# Altium PCB PCB.PcbDoc
Units mm, origin at the board's own origin, x right, y up, seen from the top; angles counter-clockwise.
Board outline 85.09 x 62.86 mm, 4 copper layers (Top Layer, Internal Plane 1, Internal Plane 2, Bottom Layer); 30 components, 16 nets, 76 pads, 0 vias.
Unrouted connection lines stored in the file: 60.
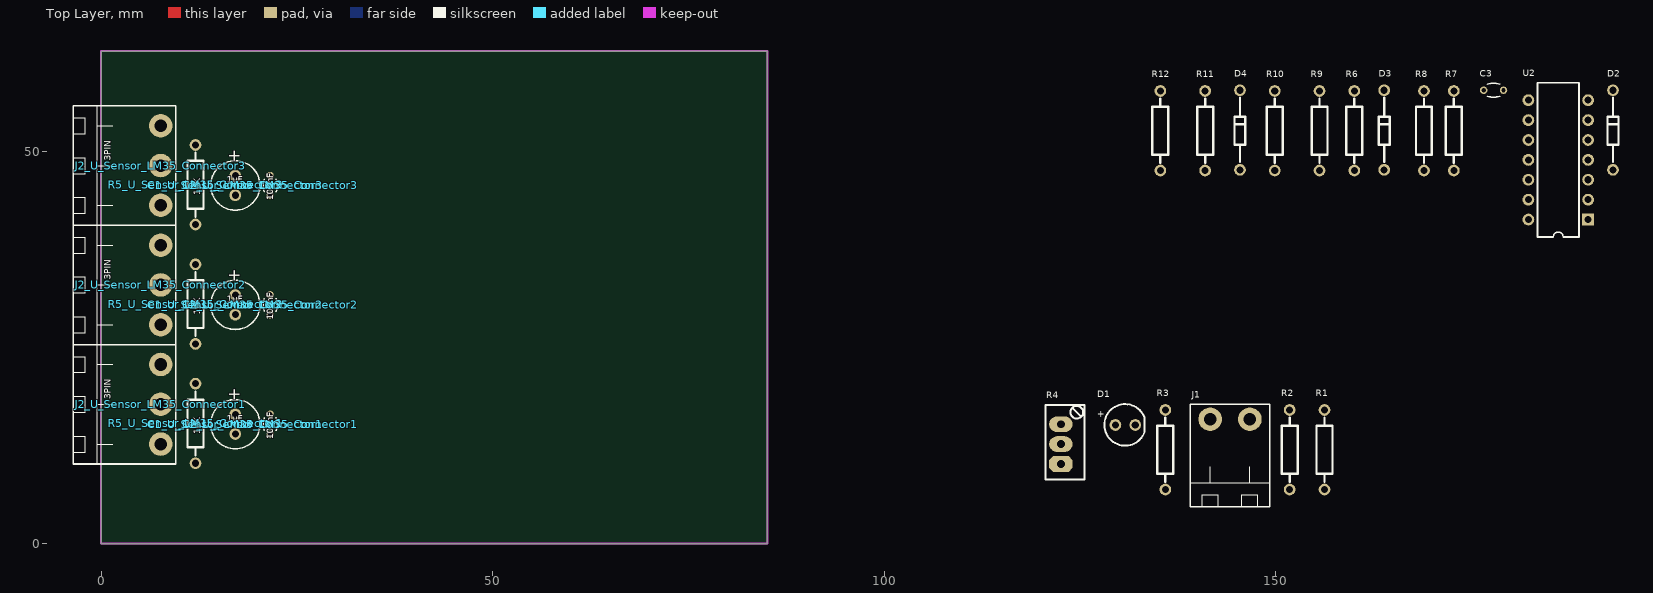
[diagram p0: Top Layer view]
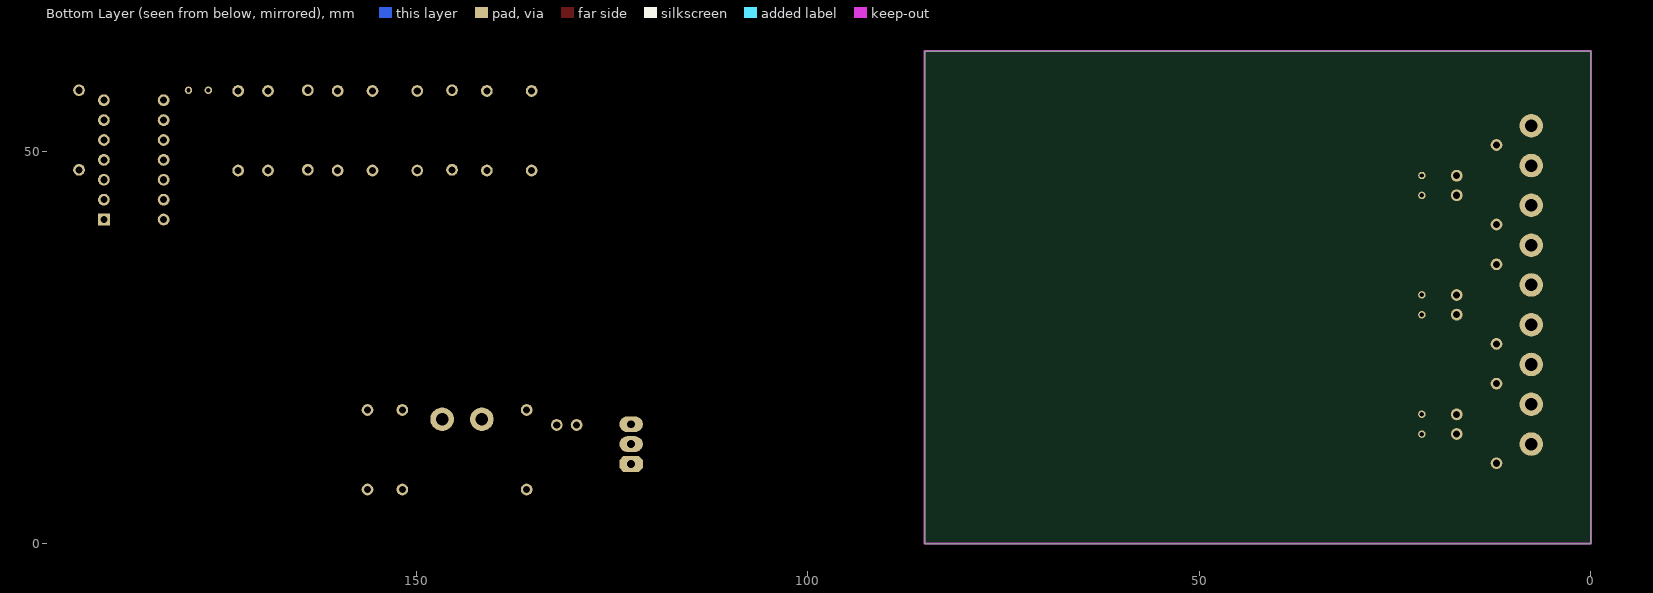
[diagram p1: Bottom Layer view, seen from below]
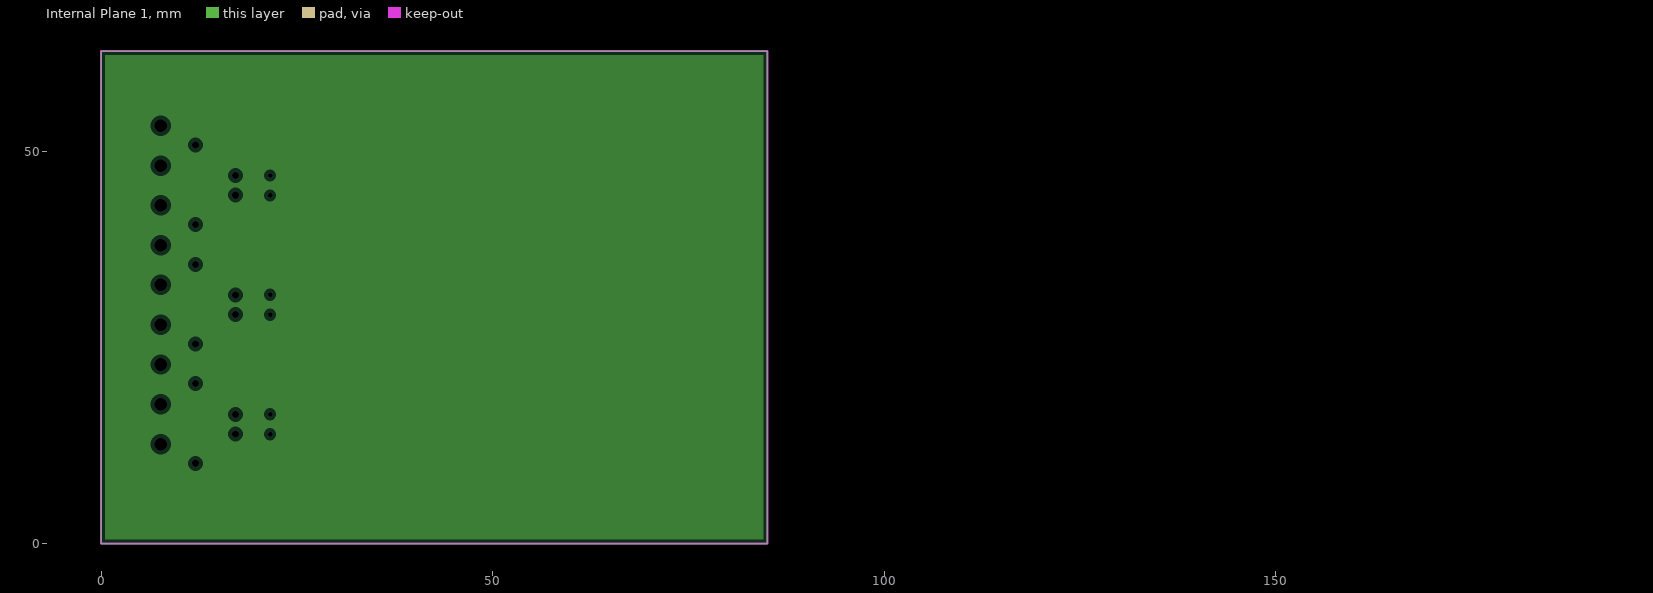
[diagram p2: Internal Plane 1, clearances drawn from the general rule]
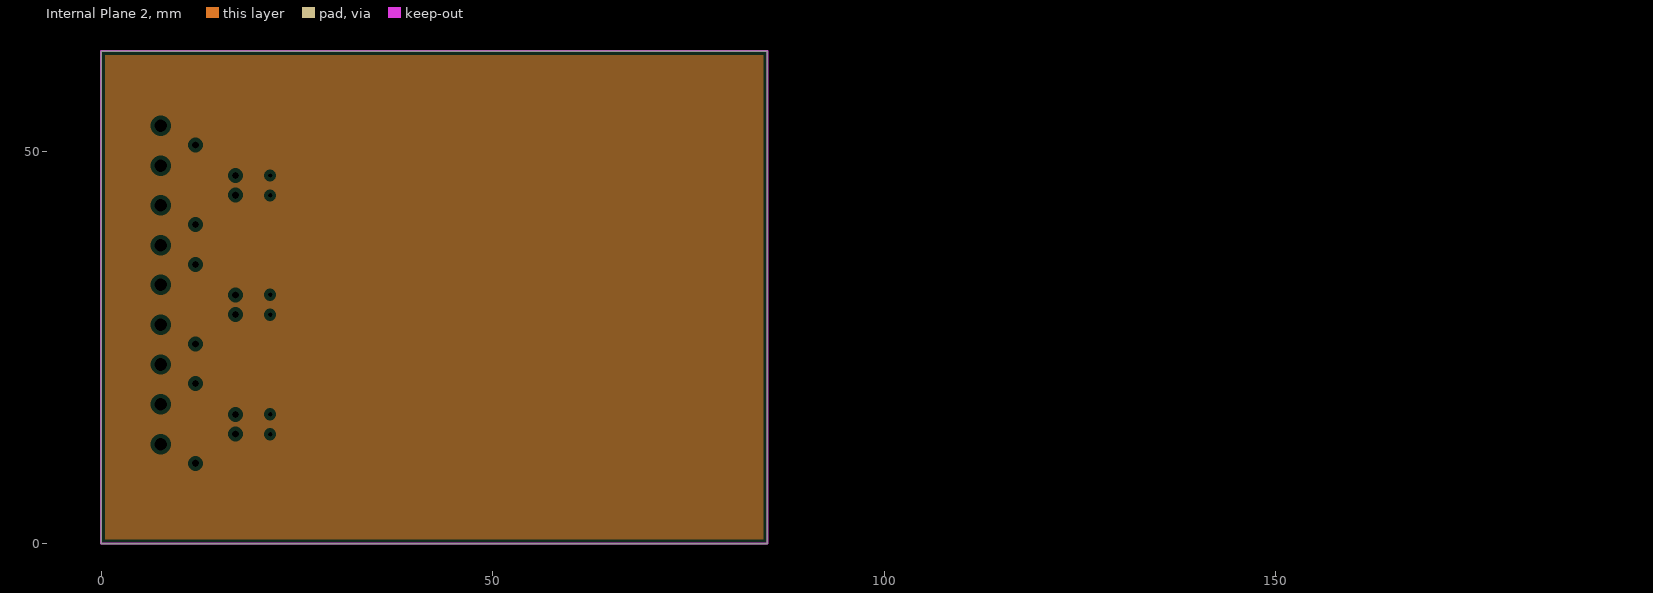
[diagram p3: Internal Plane 2, clearances drawn from the general rule]

## Layer stack, top to bottom
Top Solder: solder mask 0.0102, Solder Resist, Dk 3.5
Top Layer: signal copper 0.0356
Dielectric1: dielectric 0.32, FR-4, Dk 4.8
Internal Plane 1: plane copper 0.0356
Dielectric2: dielectric 0.32, FR-4, Dk 4.8
Internal Plane 2: plane copper 0.0356
Dielectric3: dielectric 0.32, FR-4, Dk 4.8
Bottom Layer: signal copper 0.0356
Bottom Solder: solder mask 0.0102, Solder Resist, Dk 3.5

## Board outline
0,0 85.09,0 85.09,62.865 0,62.865

## Design rules (kind name [scope] priority, off if disabled: settings)
Clearance [All] p1: gap=0.6
ComponentClearance [All] p1: gap=0 collisioncheckmode=3 verticalgap=0 showdistances=FALSE
Height [All] p1: minheight=0 maxheight=50 prefheight=12.7
HoleSize [All] p1: absolutevalues=TRUE maxlimit=5 minlimit=0.025 maxpercent=80.000 minpercent=20.000
PlaneClearance [All] p1: clearance=0.508
PlaneConnect [All] p1: planeconnectstyle=Relief reliefexpansion=0.508 reliefentries=4 reliefconductorwidth=0.254 reliefairgap=0.254
PolygonConnect [All] p1: connectstyle=Relief reliefconductorwidth=0.254 reliefentries=4 polygonreliefangle="90 Angle" airgapwidth=0.254
RoomDefinition U_Sensor_LM35_Package [InComponentClass('U_Sensor_LM35_Package')] p1: confinementstyle=ConfineIn formatcopy=TRUE lockcomponents=FALSE outline 133.35,38.825 195.58,38.825 195.58,61.685 133.35,61.685
RoomDefinition U_Sensor_LM35_Connector3 [InComponentClass('U_Sensor_LM35_Connector3')] p2: confinementstyle=ConfineIn formatcopy=TRUE lockcomponents=FALSE outline -3.81,39.37 22.86,39.37 22.86,56.515 -3.81,56.515
RoomDefinition U_Sensor_LM35_Connector2 [InComponentClass('U_Sensor_LM35_Connector2')] p3: confinementstyle=ConfineIn formatcopy=TRUE lockcomponents=FALSE outline -3.81,24.13 22.86,24.13 22.86,41.275 -3.81,41.275
RoomDefinition U_Sensor_LM35_Connector1 [InComponentClass('U_Sensor_LM35_Connector1')] p4: confinementstyle=ConfineIn formatcopy=TRUE lockcomponents=FALSE outline -3.81,8.89 22.86,8.89 22.86,26.035 -3.81,26.035
RoomDefinition Main [InComponentClass('Main')] p5: confinementstyle=ConfineIn formatcopy=TRUE lockcomponents=FALSE outline 120.015,4.445 158.115,4.445 158.115,20.955 120.015,20.955
RoutingVias [All] p1: holewidth=0.813 width=1.575 viastyle="Through Hole" minholewidth=0.711 minwidth=1.27 maxholewidth=0.711 maxwidth=1.27
SilkToSolderMaskClearance SilkscreenOverComponentPads [IsPad] p1: minsilkscreentomaskgap=0.254 clearancetoexposedcopper=TRUE
SolderMaskExpansion [All] p1: expansion=0.102
Width [All] p1: maxlimit=0.254 minlimit=0.254 preferedwidth=0.254
Width Width_VDD [InNet('VDD_2')] p2 off: maxlimit=0.3 minlimit=0.3 preferedwidth=0.3
24 further rules are at their usual default settings.

## Classes and differential pairs
channel class Sensor_LM35_Connector: U_Sensor_LM35_Connector1 U_Sensor_LM35_Connector2 U_Sensor_LM35_Connector3
component class U_Sensor_LM35_Package: C3 D2 D3 D4 R6 R7 R8 R9 R10 R11 R12 U2
component class U_Sensor_LM35_Connector3: C1_U_Sensor_LM35_Connector3 C2_U_Sensor_LM35_Connector3 J2_U_Sensor_LM35_Connector3 R5_U_Sensor_LM35_Connector3
component class U_Sensor_LM35_Connector2: C1_U_Sensor_LM35_Connector2 C2_U_Sensor_LM35_Connector2 J2_U_Sensor_LM35_Connector2 R5_U_Sensor_LM35_Connector2
component class U_Sensor_LM35_Connector1: C1_U_Sensor_LM35_Connector1 C2_U_Sensor_LM35_Connector1 J2_U_Sensor_LM35_Connector1 R5_U_Sensor_LM35_Connector1
component class Main: D1 J1 R1 R2 R3 R4

## Components (designator, comment, footprint, x,y, rotation, side; value= is the part's Value field where it differs from the comment)
C1_U_Sensor_LM35_Connector1 "1uF" CAPPR2.5-6.3x5 17.145,15.24 r270 top (schematic designator C1)
C1_U_Sensor_LM35_Connector2 "1uF" CAPPR2.5-6.3x5 17.145,30.48 r270 top (schematic designator C1)
C1_U_Sensor_LM35_Connector3 "1uF" CAPPR2.5-6.3x5 17.145,45.72 r270 top (schematic designator C1)
C2_U_Sensor_LM35_Connector1 "100nF" CAPNTO2.54-3.05x1.78A 21.59,15.24 r90 top (schematic designator C2)
C2_U_Sensor_LM35_Connector2 "100nF" CAPNTO2.54-3.05x1.78A 21.59,30.48 r90 top (schematic designator C2)
C2_U_Sensor_LM35_Connector3 "100nF" CAPNTO2.54-3.05x1.78A 21.59,45.72 r90 top (schematic designator C2)
C3 "100nF" CAPNTO2.54-3.05x1.78A 177.8,57.875 r0 top
D1 "RED" LED-5mm_Red 130.81,15.24 r0 top
D2 "1N4148" DIODE0.4_Glass 193.04,52.795 r90 top
D3 "1N4148" DIODE0.4_Glass 163.83,52.795 r90 top
D4 "1N4148" DIODE0.4_Glass 145.415,52.795 r90 top
J1 "2PIN" Fonics_2PIN_1 144.145,15.875 r0 top
J2_U_Sensor_LM35_Connector1 "3PIN" Fonics_3PIN_1 7.62,17.78 r270 top (schematic designator J2)
J2_U_Sensor_LM35_Connector2 "3PIN" Fonics_3PIN_1 7.62,33.02 r270 top (schematic designator J2)
J2_U_Sensor_LM35_Connector3 "3PIN" Fonics_3PIN_1 7.62,48.26 r270 top (schematic designator J2)
R1 "220K" AXIAL-0.4 156.21,10.795 r90 top
R2 "1K" AXIAL-0.4 151.765,10.795 r90 top
R3 "10K" AXIAL-0.4 135.89,10.795 r90 top
R4 "10K" VR4_ 122.555,12.7 r90 top
R5_U_Sensor_LM35_Connector1 "10K" AXIAL-0.4 12.065,16.51 r270 top (schematic designator R5)
R5_U_Sensor_LM35_Connector2 "10K" AXIAL-0.4 12.065,31.75 r270 top (schematic designator R5)
R5_U_Sensor_LM35_Connector3 "10K" AXIAL-0.4 12.065,46.99 r270 top (schematic designator R5)
R6 "1K" AXIAL-0.4 160.02,51.525 r90 top
R7 "1K" AXIAL-0.4 172.72,51.525 r90 top
R8 "1K" AXIAL-0.4 168.91,51.525 r90 top
R9 "1K" AXIAL-0.4 155.575,51.525 r90 top
R10 "1K" AXIAL-0.4 149.86,51.525 r90 top
R11 "1K" AXIAL-0.4 140.97,51.525 r90 top
R12 "1K" AXIAL-0.4 135.255,51.525 r90 top
U2 "LM324" 646-06 186.055,48.985 r90 top

## Footprints (in the part's own frame and the unit in brackets; to place one, negate y for a bottom-side part, rotate by r counter-clockwise, add the part's x,y. Pads: shape width x height; smd on the part's side, far side on the other; paste and mask are expansions set on the pad)
646-06 [mm] "DIP; 14 Leads; Row Spacing 7.62 mm; Pitch 2.54 mm"
  rect 1.5x1.5 hole 0.9: 1(-7.62,-3.81)
  round 1.5 hole 0.9: 2(-5.08,-3.81) 3(-2.54,-3.81) 4(0,-3.81) 5(2.54,-3.81) 6(5.08,-3.81) 7(7.62,-3.81) 8(7.62,3.81) 9(5.08,3.81) 10(2.54,3.81) 11(0,3.81) 12(-2.54,3.81) 13(-5.08,3.81) 14(-7.62,3.81)
  silkscreen extent -9.85,-2.65 9.85,2.65
AXIAL-0.4 [mm]
  round 1.5 hole 0.9: 1(-3.9,0) 2(6.26,0)
  silkscreen extent -2.88,-1.02 5.24,1.02, body extent -4.19,-1.19 6.58,1.12, height 3.51
CAPNTO2.54-3.05x1.78A [mm] "Capacitor, Radial, Tantalum, Non-Polarised; Body 3.05 x 1.78 x 3.43 mm (WxTxH max); Pin Spacing 2.54 mm (typ)"
  round 0.95 hole 0.55: 1(-1.27,0) 2(1.27,0)
  silkscreen extent -0.8,-0.89 0.8,0.89
CAPPR2.5-6.3x5 [mm] "Capacitor, Electrolytic, Radial; Body 6.3 x 5 mm (Dia.xH typ); Pin Spacing 2.5 mm (typ)"
  round 1.5 hole 0.9: 1(-1.25,0) 2(1.25,0)
  silkscreen extent -3.15,-3.15 3.15,3.15
DIODE0.4_Glass [mm] "created by: M.Hariri (designer)"
  round 1.5 hole 0.9: 1(-5.08,0) 2(5.08,0)
  silkscreen extent -4.08,-0.7 4.12,0.7
Fonics_2PIN_1 [mm]
  round 3 hole 1.6: 1(-2.54,0) 2(2.54,0)
  silkscreen extent -5.08,-11.18 5.08,1.91
Fonics_3PIN_1 [mm]
  round 3 hole 1.6: 1(-5.08,0) 2(0,0) 3(5.08,0)
  silkscreen extent -7.62,-11.18 7.62,1.91
LED-5mm_Red [mm]
  round 1.5 hole 0.9: 1(-1.3,-0.1) 2(1.24,-0.1)
  silkscreen extent -2.71,-2.74 2.43,2.56, body extent -2.6,-2.64 2.48,2.46, height 9.6
VR4_ [mm]
  oct 2x3 hole 1: 1(-2.54,0)
  oval 2x3 hole 1: 2(2.54,0) 3(0,0)
  silkscreen extent -4.54,-3.01 4.96,1.99

## Part data
C1_U_Sensor_LM35_Connector1 C1_U_Sensor_LM35_Connector2 C1_U_Sensor_LM35_Connector3: library part "Cap Pol1", "Polarized Capacitor (Radial)"
C2_U_Sensor_LM35_Connector1 C2_U_Sensor_LM35_Connector2 C2_U_Sensor_LM35_Connector3 C3: library part Cap, "Capacitor"
D1: library part LED, "Typical INFRARED GaAs LED"
D2 D3 D4: library part Diode, "Default Diode"
J1: library part "Header 2", "Header, 2-Pin"
J2_U_Sensor_LM35_Connector1 J2_U_Sensor_LM35_Connector2 J2_U_Sensor_LM35_Connector3: library part "Header 3", "Header, 3-Pin"
R1 R2 R3 R5_U_Sensor_LM35_Connector1 R5_U_Sensor_LM35_Connector2 R5_U_Sensor_LM35_Connector3 R6 R7 R8 R9 R10 R11 R12: library part Res1, "Resistor"
R4: library part RPot1, "Potentiometer"
U2: "Quad Low-Power Operational Amplifier"

## Nets (pads, with @x,y where several pads share a name; then routed paths per layer and width w, separated by ;. In a path a pad name is that pad's centre, name@x,y a point inside that pad or via, vN(x,y) a via of type N, cw(c..) or ccw(c..) an arc to the next point about the centre after c; other vN are vias at no path point)
+15V: C3.2 J2_U_Sensor_LM35_Connector1.1 J2_U_Sensor_LM35_Connector2.1 J2_U_Sensor_LM35_Connector3.1 R4.2 U2.4
GND: C1_U_Sensor_LM35_Connector1.2 C1_U_Sensor_LM35_Connector2.2 C1_U_Sensor_LM35_Connector3.2 C2_U_Sensor_LM35_Connector1.1 C2_U_Sensor_LM35_Connector2.1 C2_U_Sensor_LM35_Connector3.1 C3.1 D1.2 J1.2 J2_U_Sensor_LM35_Connector1.3 J2_U_Sensor_LM35_Connector2.3 J2_U_Sensor_LM35_Connector3.3 R4.1 R5_U_Sensor_LM35_Connector1.2 R5_U_Sensor_LM35_Connector2.2 R5_U_Sensor_LM35_Connector3.2 R6.2 R8.1 R10.1 R12.1 U2.11
NetC1_U_Sensor_LM35_Connector1_1: C1_U_Sensor_LM35_Connector1.1 C2_U_Sensor_LM35_Connector1.2 J2_U_Sensor_LM35_Connector1.2 R5_U_Sensor_LM35_Connector1.1 U2.3
NetC1_U_Sensor_LM35_Connector2_1: C1_U_Sensor_LM35_Connector2.1 C2_U_Sensor_LM35_Connector2.2 J2_U_Sensor_LM35_Connector2.2 R5_U_Sensor_LM35_Connector2.1 U2.5
NetC1_U_Sensor_LM35_Connector3_1: C1_U_Sensor_LM35_Connector3.1 C2_U_Sensor_LM35_Connector3.2 J2_U_Sensor_LM35_Connector3.2 R5_U_Sensor_LM35_Connector3.1 U2.10
NetD1_1: D1.1 R3.2
NetD2_1: D2.1 U2.1
NetD2_2: D2.2 D3.2 D4.2 R2.1 R6.1 R7.2 R9.2 R11.2
NetD3_1: D3.1 U2.7
NetD4_1: D4.1 U2.8
NetJ1_1: J1.1 R1.2 R3.1 U2.14
NetR1_1: R1.1 R2.2 U2.12
NetR4_3: R4.3 U2.13
NetR7_1: R7.1 R8.2 U2.2
NetR9_1: R9.1 R10.2 U2.6
NetR11_1: R11.1 R12.2 U2.9

## Polygon pours and split planes (outlines as drawn)
no net on Internal Plane 1 (split plane): 84.58,0.51 0.51,0.51 0.51,62.355 84.58,62.355
no net on Internal Plane 2 (split plane): 84.58,0.51 0.51,0.51 0.51,62.355 84.58,62.355

## Keep-outs
Keep-Out Layer:
  the board outline again, w0.254

## Text inside footprints (layer, text, board x,y; h text height)
C1_U_Sensor_LM35_Connector1: Top Overlay "+" at 16.395,19.865 h1.5 r270
C1_U_Sensor_LM35_Connector2: Top Overlay "+" at 16.395,35.105 h1.5 r270
C1_U_Sensor_LM35_Connector3: Top Overlay "+" at 16.395,50.345 h1.5 r270
D1: Top Overlay "+" at 127.224,16.105 h0.85